# Altium PCB Intf_PCB.PcbDoc
Units mm, origin at the board's own origin, x right, y up, seen from the top; angles counter-clockwise.
Board outline 42.8 x 73.02 mm, 2 copper layers (Top Layer, Bottom Layer); 17 components, 36 nets, 102 pads, 3 vias.
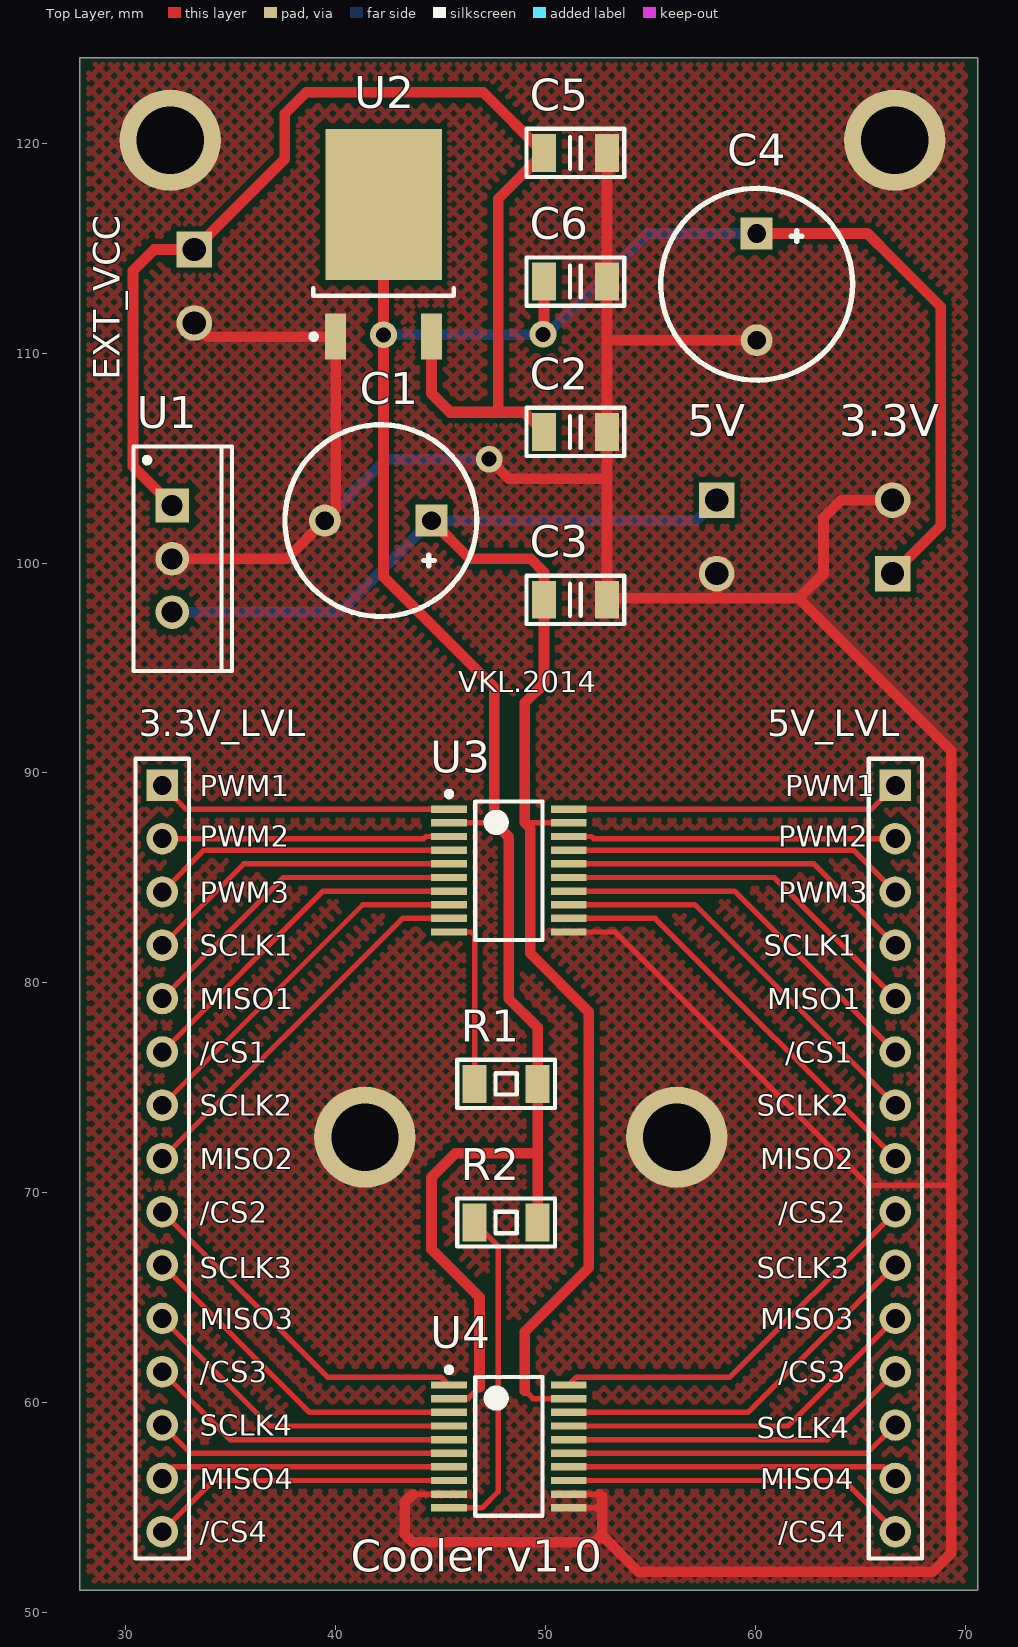
[diagram p0: Top Layer view]
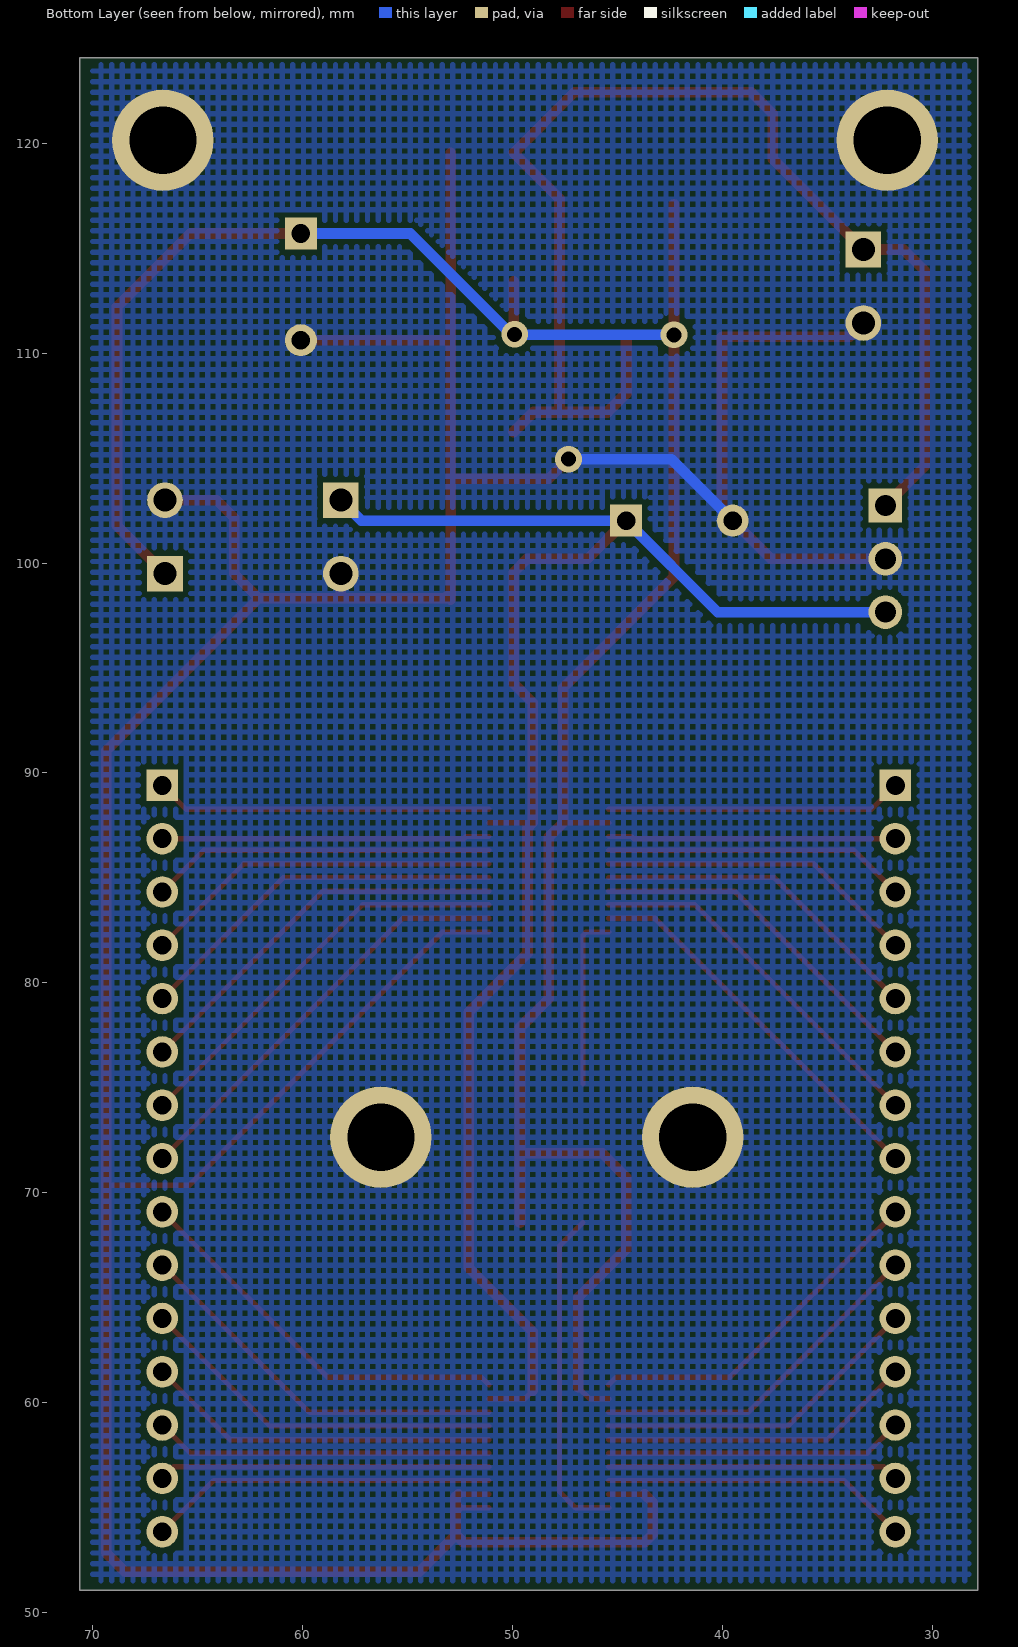
[diagram p1: Bottom Layer view, seen from below]

## Layer stack, top to bottom
Top Solder: solder mask 0.0102, Solder Resist, Dk 3.5
Top Layer: signal copper 0.0356
Dielectric 1: dielectric 0.32, FR-4, Dk 4.8
Bottom Layer: signal copper 0.0356
Bottom Solder: solder mask 0.0102, Solder Resist, Dk 3.5

## Board outline
27.813,51.054 70.612,51.054 70.612,124.079 27.813,124.079

## Design rules (kind name [scope] priority, off if disabled: settings)
Clearance [All] p1: gap=0.254
MinimumSolderMaskSliver [All] p1: minsoldermaskwidth=0.076
PlaneConnect [All] p1: planeconnectstyle=Direct reliefexpansion=0.508 reliefentries=4 reliefconductorwidth=0.254 reliefairgap=0.254
PolygonConnect [All] p1: connectstyle=Direct reliefconductorwidth=0.254 reliefentries=4 polygonreliefangle="90 Angle" airgapwidth=0.254
RoutingVias [All] p1: holewidth=0.711 width=1.27 viastyle="Through Hole" minholewidth=0.711 minwidth=1.27 maxholewidth=0.711 maxwidth=1.27
SilkToSolderMaskClearance [IsPad] p1: minsilkscreentomaskgap=0.076 clearancetoexposedcopper=TRUE
SolderMaskExpansion [All] p1: expansion=0.076
Width Width_3 [InNet('5VCC')] p1: maxlimit=0.533 minlimit=0.254 preferedwidth=0.508
Width Width_2 [InNet('GND')] p2: maxlimit=0.533 minlimit=0.254 preferedwidth=0.508
Width Width_1 [InNet('+12V')] p3: maxlimit=0.533 minlimit=0.254 preferedwidth=0.508
Width [InNet('3.3VCC')] p4: maxlimit=0.6 minlimit=0.127 preferedwidth=0.5
26 further rules are at their usual default settings.

## Components (designator, comment, footprint, x,y, rotation, side; value= is the part's Value field where it differs from the comment)
3.3V "PWL-2" 15EDGVC 66.548,99.497 r90 top (schematic designator X3)
3.3V_LVL "PLS-15" PLS-15-3D 31.75,89.408 r270 top (schematic designator X4)
5V "PWL-2" 15EDGVC 58.166,102.997 r270 top (schematic designator X2)
5V_LVL "PLS-15" PLS-15-3D 66.675,89.408 r270 top (schematic designator X5)
C1 "10000uF" CAP470X25V 42.037,102.022 r180 top
C2 "0.33uF" C_1206 51.435,106.247 r0 top
C3 "0.1uF" C_1206 51.435,98.247 r0 top
C4 "10uF" CAP470X25V 60.071,113.157 r270 top
C5 "0.33uF" C_1206 51.435,119.541 r0 top
C6 "0.1uF" C_1206 51.435,113.411 r0 top
EXT_VCC "PWL-2" 15EDGVC 33.274,114.935 r270 top (schematic designator X1)
R1 "50k" R_1206 48.133,75.184 r180 top
R2 "50k" R_1206 48.133,68.58 r180 top
U1 "LM78M05CT" T03B 32.224,100.201 r270 top
U2 "LM1117DT-3.3" TD03B_M 42.291,115.189 r90 top
U3 "TXB0108" TSOP65P640X120-20N 48.26,85.344 r0 top
U4 "TXB0108" TSOP65P640X120-20N 48.26,57.912 r0 top

## Footprints (in the part's own frame and the unit in brackets; to place one, negate y for a bottom-side part, rotate by r counter-clockwise, add the part's x,y. Pads: shape width x height; smd on the part's side, far side on the other; paste and mask are expansions set on the pad)
15EDGVC [mm]
  rect 1.7x1.7 hole 1.1: 1(0,0)
  round 1.7 hole 1.1: 2(3.5,0)
  body extent -4.5,-3 6,3, height 10
C_1206 [mm]
  rect 1.15x1.8 smd: 1(-1.5,0) 2(1.5,0)
  silkscreen extent -2.33,-1.15 2.33,1.15, body extent -1.6,-0.8 1.6,0.8, height 1
CAP470X25V [mil]
  rect 60x60 hole 35: 1(-100,0)
  round 60 hole 35: 2(100,0)
  silkscreen extent -185,-180 175,180, body extent -198,-198 198,198, height 513
PLS-15-3D [mm] "Connector; Header; 15 Position"
  rect 1.5x1.5 hole 0.9: 1(0,0)
  round 1.5 hole 0.9: 2(2.54,0) 3(5.08,0) 4(7.62,0) 5(10.16,0) 6(12.7,0) 7(15.24,0) 8(17.78,0) 9(20.32,0) 10(22.86,0) 11(25.4,0) 12(27.94,0) 13(30.48,0) 14(33.02,0) 15(35.56,0)
  silkscreen extent -1.27,-1.27 36.83,1.27, body extent -1.27,-1.27 36.83,1.27, height 8.44
R_1206 [mm]
  rect 1.15x1.8 smd: 1(-1.5,0) 2(1.5,0)
  silkscreen extent -2.33,-1.15 2.33,1.15, body extent -1.6,-0.8 1.6,0.8, height 1
T03B [mm] "TO, Thru-Hole, Vertical, Heatsink Mounted; 3 In-Line Leads; Pitch 2.54 mm"
  rect 1.6x1.6 hole 1: 1(-2.54,0)
  round 1.6 hole 1: 2(0,0) 3(2.54,0)
  silkscreen extent -5.35,-1.85 5.35,2.85, body extent -5.4,-1.9 5.4,2.9, height 19.4
TD03B_M [mm] "D-PAK, 4-Leads, Body 6.1x6.6mm, Pitch 2.29mm, Lead Span 9.7mm, IPC Low Density"
  rect 2.2x1 smd: 1(-4.4,2.28) 3(-4.4,-2.28)
  rect 7.2x5.55 smd: 4(1.9,0)
  silkscreen extent -4.52,-3.35 -2.1,3.45, body extent -2.45,-3.35 3.75,3.35, height 2.38
TSOP65P640X120-20N [mm] "TSOP, 20-Leads, Body 6,6x4,5mm (max), Pitch 0,65mm, IPC Medium Density"
  rect 1.7x0.35 smd: 1(-2.85,2.925) 2(-2.85,2.275) 3(-2.85,1.625) 4(-2.85,0.975) 5(-2.85,0.325) 6(-2.85,-0.325) 7(-2.85,-0.975) 8(-2.85,-1.625) 9(-2.85,-2.275) 10(-2.85,-2.925) 11(2.85,-2.925) 12(2.85,-2.275) 13(2.85,-1.625) 14(2.85,-0.975) 15(2.85,-0.325) 16(2.85,0.325) 17(2.85,0.975) 18(2.85,1.625) 19(2.85,2.275) 20(2.85,2.925)
  silkscreen extent -2.97,-3.3 1.6,3.77, body extent -2.25,-3.3 2.25,3.3, height 1.2

## Part data
3.3V 5V EXT_VCC: "Header, 2-Pin"
3.3V_LVL 5V_LVL: "Header, 15-Pin"
C1 C4: library part C_10_12_5mm, "Capacitor"
C2 C3 C5 C6: library part C1206, "Capacitor"
R1 R2: library part R1206, "Resistor"
U1: "3-Terminal Positive Voltage Regulators"
U2: "800mA Low-Dropout Linear Regulator"

## Free pads (board coordinates)
  round 4.826 hole 3.2: 2(32.131,120.142) 2(41.402,72.644) 2(56.261,72.644) 2(66.647,120.142)

## Via types
v1: diameter 1.27, hole 0.711, Top Layer to Bottom Layer, 3 vias

## Nets (pads, with @x,y where several pads share a name; then routed paths per layer and width w, separated by ;. In a path a pad name is that pad's centre, name@x,y a point inside that pad or via, vN(x,y) a via of type N, cw(c..) or ccw(c..) an arc to the next point about the centre after c; other vN are vias at no path point)
3.3VCC: 3.3V.1 C4.1 C6.1 R1.1 R2.1 U2.4 U3.2 U4.2 | length 118.1
  Top Layer w0.254: U4.2 46.324,60.187 46.863,60.726 ; U3.2 47.563,87.619 47.574,87.63
  Top Layer w0.508: U2.4 v1(42.291,110.871) 42.291,99.339 47.574,94.056 47.574,87.63 48.26,86.944 48.26,79.248 49.633,77.875 R1.1 R2.1 ; 46.863,60.726 46.863,65.024 44.577,67.31 44.577,70.739 45.72,71.882 49.633,71.882 ; v1(49.887,110.895) 49.935,110.895 C6.1 ; C4.1 65.346,115.697 66.548,114.495 66.548,114.494 68.834,112.208 68.834,101.783 3.3V.1
  Bottom Layer w0.508: v1(42.291,110.871) 50.038,110.871 54.864,115.697 C4.1
5VCC: 5V.1 C1.1 C3.1 U1.3 U3.19 U4.19 | length 80.8
  Top Layer w0.254: 49.022,60.568 49.403,60.187 U4.19 ; 49.022,87.63 49.033,87.619 U3.19
  Top Layer w0.508: C1.1 46.396,100.203 49.3,100.203 49.935,99.568 C3.1 49.935,94.258 49.022,93.345 49.022,88.265 49.022,87.63 ; 49.022,60.568 49.022,63.373 52.07,66.421 52.07,78.613 49.276,81.407 49.276,86.699 49.276,87.376 49.033,87.619
  Bottom Layer w0.508: U1.3 40.215,97.661 C1.1 57.191,102.022 5V.1
+12V: C2.1 C5.1 EXT_VCC.1 U1.1 U2.3 | length 59.5
  Top Layer w0.508: U1.1 30.353,104.612 30.353,113.919 31.369,114.935 EXT_VCC.1 37.592,119.253 37.592,121.412 38.608,122.428 47.048,122.428 C5.1 47.752,117.358 47.752,107.315
  Top Layer w0.533: U2.3 44.571,108.083 45.466,107.188 48.994,107.188 C2.1
/CS1-3.3: 3.3V_LVL.6 U3.7 | length 16.8
  Top Layer w0.254: 3.3V_LVL.6 39.411,84.369 U3.7
/CS1-5: 5V_LVL.6 U3.14 | length 18.7
  Top Layer w0.254: U3.14 59.014,84.369 5V_LVL.6
/CS2-3.3: 3.3V_LVL.9 U4.1 | length 17.1
  Top Layer w0.254: 3.3V_LVL.9 39.624,61.214 45.033,61.214 U4.1
/CS2-5: 5V_LVL.9 U4.20 | length 19
  Top Layer w0.254: U4.20 51.487,61.214 58.801,61.214 5V_LVL.9
/CS3-3.3: 3.3V_LVL.12 U4.5 | length 15
  Top Layer w0.254: 3.3V_LVL.12 34.981,58.237 U4.5
/CS3-5: 5V_LVL.12 U4.16 | length 16.9
  Top Layer w0.254: U4.16 63.444,58.237 5V_LVL.12
/CS4-3.3: 3.3V_LVL.15 U4.8 | length 14.7
  Top Layer w0.254: 3.3V_LVL.15 34.189,56.287 U4.8
/CS4-5: 5V_LVL.15 U4.13 | length 16.6
  Top Layer w0.254: U4.13 64.236,56.287 5V_LVL.15
GND: 3.3V.2 5V.2 C1.2 C2.2 C3.2 C4.2 C5.2 C6.2 EXT_VCC.2 pad.2 U1.2 U2.1 U3.11 U4.9 U4.11 U4.12 | length 194.2
  Top Layer w0.254: 43.699,55.637 U4.9 ; U4.11 52.574,54.987 ; U4.12 52.567,55.637 ; U3.11 53.34,82.419 53.34,82.394 65.376,70.358 69.342,70.358
  Top Layer w0.508: U1.2 37.675,100.201 C1.2 40.011,102.536 U2.1 37.349,110.789 33.92,110.789 EXT_VCC.2 ; 43.699,55.637 43.307,55.245 43.307,53.721 43.688,53.34 52.324,53.34 52.705,53.721 52.705,55.118 ; v1(47.32,104.953) 48.26,104.013 52.935,104.013 ; 52.567,55.637 52.705,55.499 52.705,55.118 ; 52.578,54.991 52.705,55.118 ; 52.68,53.696 54.432,51.943 68.453,51.943 69.342,52.832 69.342,70.358 69.342,91.059 62.078,98.323 ; C2.2@52.935,106.224 C2.2 ; 52.935,110.617 C4.2 ; C5.2 C6.2 C2.2 ; C3.2@53.113,98.425 C3.2 ; 5V.2 58.166,98.323 ; 3.3V.2 64.085,102.997 63.251,102.163 63.251,99.497 62.078,98.323 ; C3.2 C2.2 ; C3.2 52.935,98.323 58.166,98.323 ; 58.166,98.323 62.078,98.323
  Bottom Layer w0.508: C1.2 42.427,104.953 v1(47.32,104.953)
MISO1-3.3: 3.3V_LVL.5 U3.6 | length 16.1
  Top Layer w0.254: 3.3V_LVL.5 37.521,85.019 U3.6
MISO1-5: 5V_LVL.5 U3.15 | length 18
  Top Layer w0.254: U3.15 60.904,85.019 5V_LVL.5
MISO2-3.3: 3.3V_LVL.8 U3.9 | length 18.4
  Top Layer w0.254: 3.3V_LVL.8 43.191,83.069 U3.9
MISO2-5: 5V_LVL.8 U3.12 | length 20.3
  Top Layer w0.254: U3.12 55.234,83.069 5V_LVL.8
MISO3-3.3: 3.3V_LVL.11 U4.4 | length 15.8
  Top Layer w0.254: 3.3V_LVL.11 36.871,58.887 U4.4
MISO3-5: 5V_LVL.11 U4.17 | length 17.7
  Top Layer w0.254: U4.17 61.554,58.887 5V_LVL.11
MISO4-3.3: 3.3V_LVL.14 U4.7 | length 13.9
  Top Layer w0.254: 3.3V_LVL.14 32.299,56.937 U4.7
MISO4-5: 5V_LVL.14 U4.14 | length 15.8
  Top Layer w0.254: U4.14 66.126,56.937 5V_LVL.14
NetR1_2: R1.2 U3.10 | length 8.4
  Top Layer w0.254: U3.10 46.482,82.419 46.633,82.268 R1.2
NetR2_2: R2.2 U4.10 | length 15.9
  Top Layer w0.254: U4.10 46.986,54.987 47.752,55.753 47.752,67.461 R2.2
PWM1-3.3: 3.3V_LVL.1 U3.1 | length 14.1
  Top Layer w0.254: 3.3V_LVL.1 32.889,88.269 U3.1
PWM1-5: 5V_LVL.1 U3.20 | length 16
  Top Layer w0.254: U3.20 65.536,88.269 5V_LVL.1
PWM2-3.3: 3.3V_LVL.2 U3.3 | length 13.7
  Top Layer w0.254: 3.3V_LVL.2 44.222,86.868 44.323,86.969 U3.3
PWM2-5: 5V_LVL.2 U3.18 | length 15.6
  Top Layer w0.254: U3.18 52.197,86.969 52.298,86.868 5V_LVL.2
PWM3-3.3: 3.3V_LVL.3 U3.4 | length 14.5
  Top Layer w0.254: 3.3V_LVL.3 33.741,86.319 U3.4
PWM3-5: 5V_LVL.3 U3.17 | length 16.4
  Top Layer w0.254: U3.17 64.684,86.319 5V_LVL.3
SCLK1-3.3: 3.3V_LVL.4 U3.5 | length 15.3
  Top Layer w0.254: 3.3V_LVL.4 35.631,85.669 U3.5
SCLK1-5: 5V_LVL.4 U3.16 | length 17.2
  Top Layer w0.254: U3.16 62.794,85.669 5V_LVL.4
SCLK2-3.3: 3.3V_LVL.7 U3.8 | length 17.6
  Top Layer w0.254: 3.3V_LVL.7 41.301,83.719 U3.8
SCLK2-5: 5V_LVL.7 U3.13 | length 19.5
  Top Layer w0.254: U3.13 57.124,83.719 5V_LVL.7
SCLK3-3.3: 3.3V_LVL.10 U4.3 | length 16.6
  Top Layer w0.254: 3.3V_LVL.10 38.761,59.537 U4.3
SCLK3-5: 5V_LVL.10 U4.18 | length 18.5
  Top Layer w0.254: U4.18 59.664,59.537 5V_LVL.10
SCLK4-3.3: 3.3V_LVL.13 U4.6 | length 14.2
  Top Layer w0.254: 3.3V_LVL.13 33.091,57.587 U4.6
SCLK4-5: 5V_LVL.13 U4.15 | length 16.1
  Top Layer w0.254: U4.15 65.334,57.587 5V_LVL.13

## Polygon pours and split planes (outlines as drawn)
GND on Top Layer "Top Layer-GND" (hatched 45Degree grid 0.508 track 0.254, pour order 2): 70,51.5 70,123.75 28.25,123.75 28.25,51.5
GND on Bottom Layer "Top Layer-No Net" (hatched 90Degree grid 0.508 track 0.254, pour order 4): 70,51.5 28.25,51.5 28.25,123.75 70,123.75

## Silkscreen, mask and mechanical layers (free items; w line width, h text height)
Top Overlay:
  text "VKL.2014" at 45.847,93.853 h1.02
  text "PWM1" at 33.528,88.9 h1.02
  text "PWM1" at 61.425,88.9 h1.02
  text "PWM2" at 33.528,86.487 h1.02
  text "PWM2" at 61.087,86.487 h1.02
  text "PWM3" at 33.528,83.82 h1.02
  text "PWM3" at 61.087,83.82 h1.02
  text "SCLK1" at 33.528,81.28 h1.02
  text "SCLK1" at 60.41,81.28 h1.02
  text "MISO1" at 33.528,78.74 h1.02
  text "MISO1" at 60.579,78.74 h1.02
  text "/CS1" at 33.528,76.2 h1.02
  text "/CS1" at 61.425,76.2 h1.02
  text "SCLK2" at 33.528,73.66 h1.02
  text "SCLK2" at 60.071,73.66 h1.02
  text "MISO2" at 33.528,71.12 h1.02
  text "MISO2" at 60.24,71.12 h1.02
  text "/CS2" at 33.528,68.58 h1.02
  text "/CS2" at 61.087,68.58 h1.02
  text "SCLK3" at 33.528,65.913 h1.02
  text "SCLK3" at 60.071,65.913 h1.02
  text "MISO3" at 33.528,63.5 h1.02
  text "MISO3" at 60.24,63.5 h1.02
  text "/CS3" at 33.528,60.96 h1.02
  text "/CS3" at 61.087,60.96 h1.02
  text "SCLK4" at 33.528,58.42 h1.02
  text "SCLK4" at 60.071,58.293 h1.02
  text "MISO4" at 33.528,55.88 h1.02
  text "MISO4" at 60.24,55.88 h1.02
  text "/CS4" at 33.528,53.34 h1.02
  text "/CS4" at 61.087,53.34 h1.02
  text "Cooler v1.0" at 40.733,51.943 h1.52
Mechanical 1:
  the board outline again, w0.254